# Altium PCB PCB_Air_Quality.pcbdoc
Units mil, origin at the board's own origin, x right, y up, seen from the top; angles counter-clockwise.
Board outline 4625 x 4090 mil, 2 copper layers (Top Layer, Bottom Layer); 49 components, 34 nets, 123 pads, 36 vias.
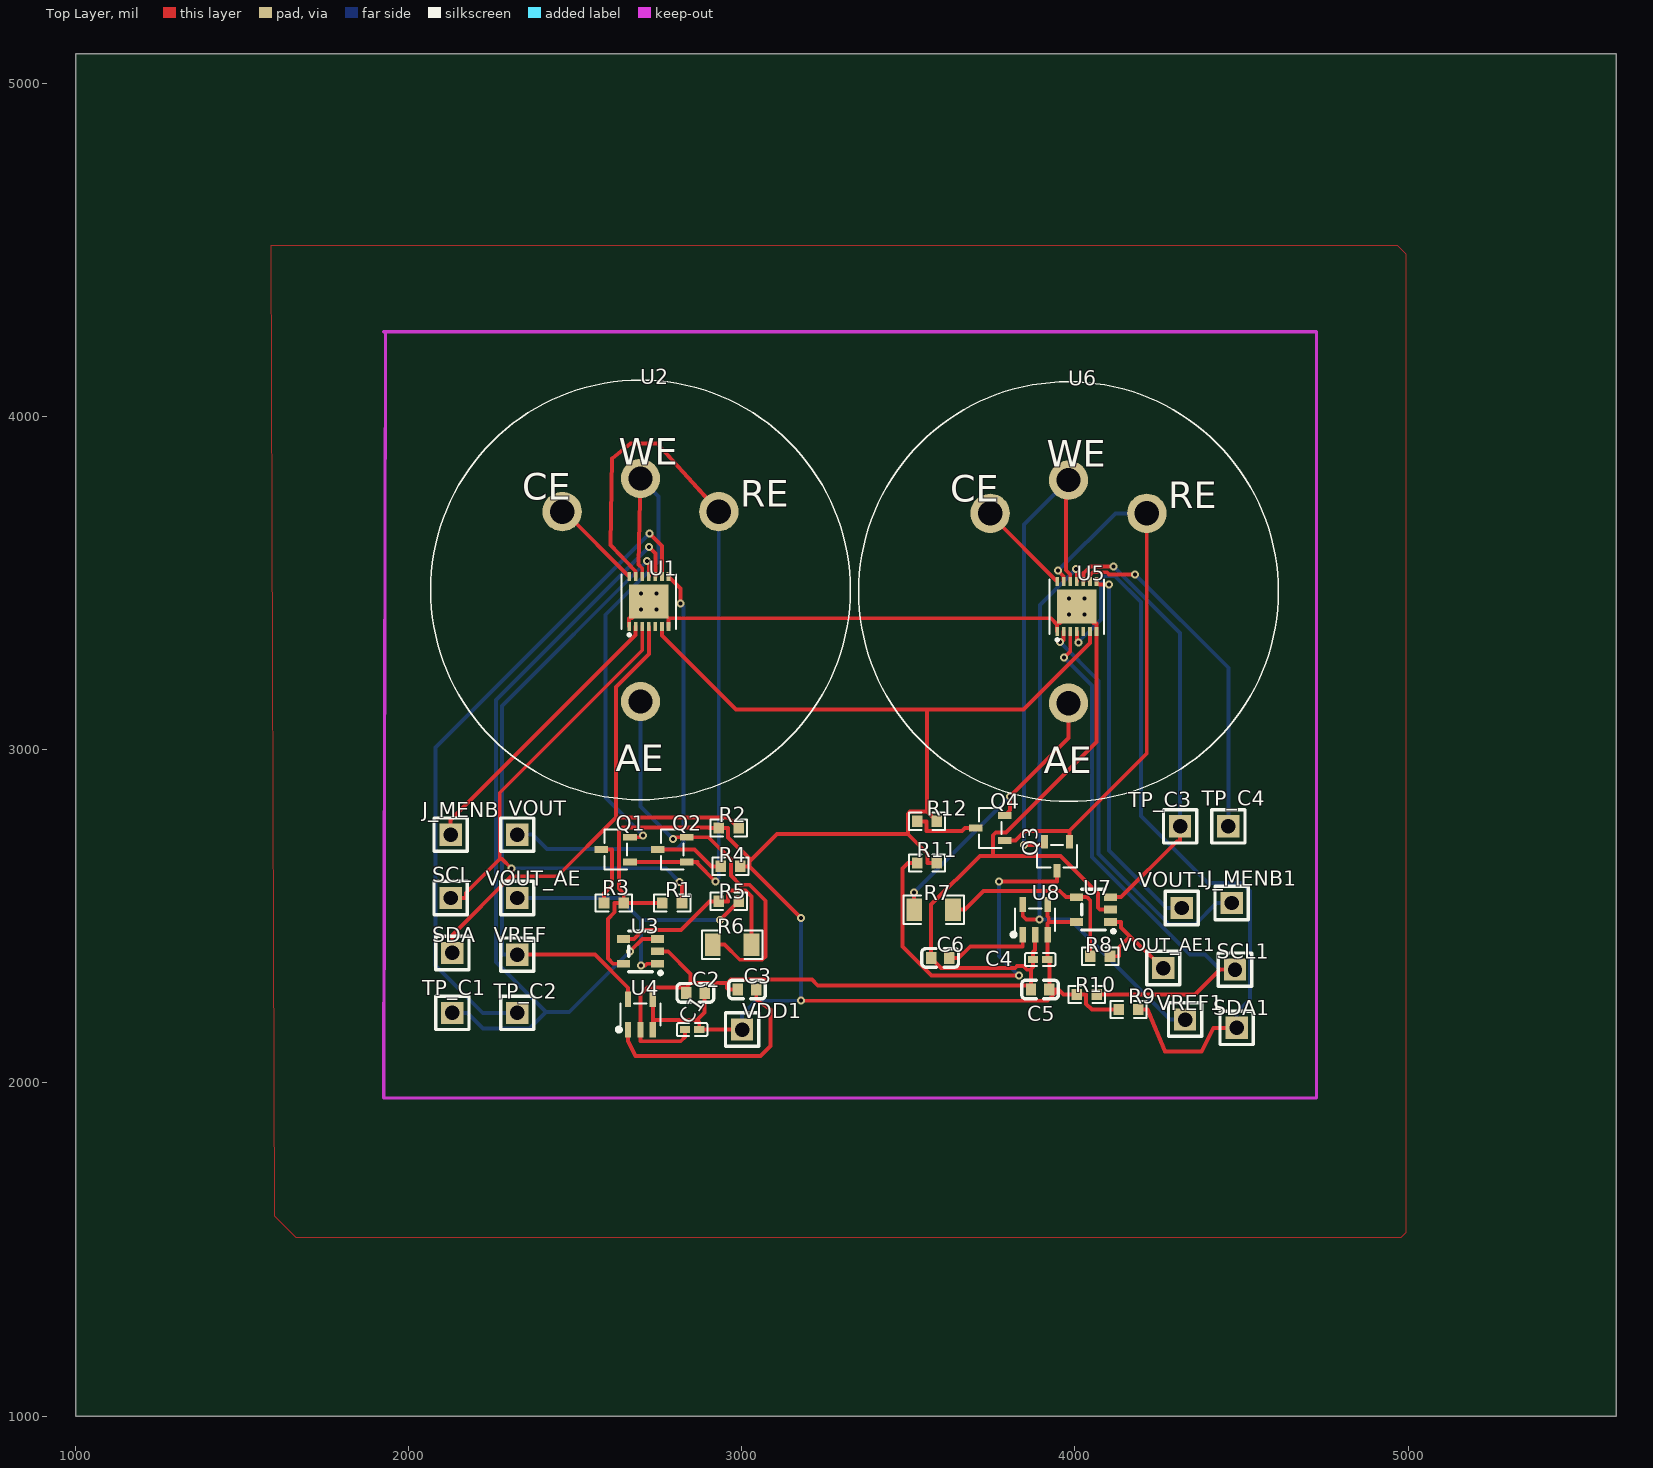
[diagram p0: Top Layer view]
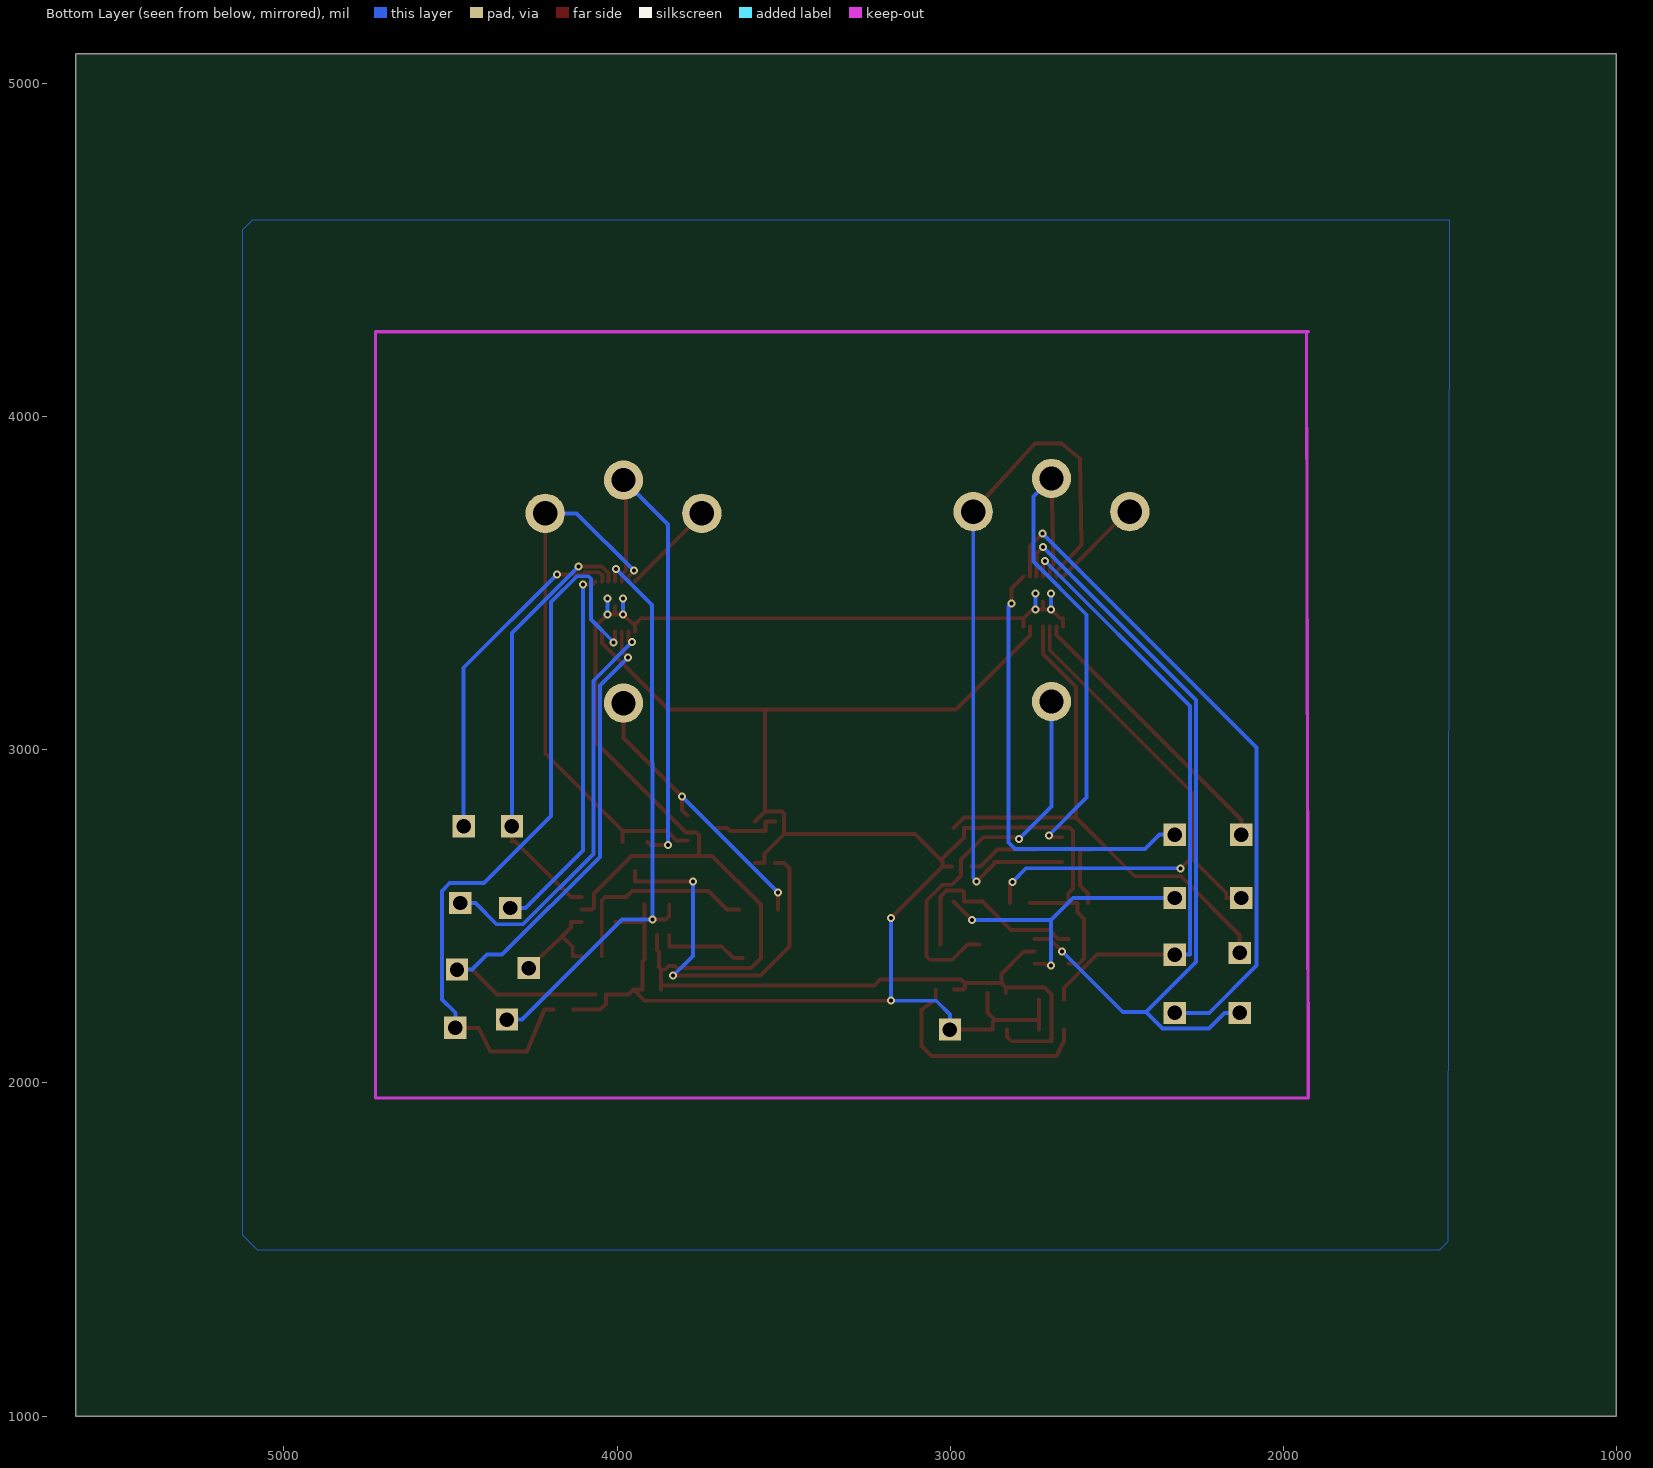
[diagram p1: Bottom Layer view, seen from below]

## Layer stack, top to bottom
Top Solder: solder mask 0.4, Solder Resist, Dk 3.5
Top Layer: signal copper 1.4
Dielectric1: dielectric 12.6, FR-4, Dk 4.8
Bottom Layer: signal copper 1.4
Bottom Solder: solder mask 0.4, Solder Resist, Dk 3.5

## Board outline
5625,1000 1000,1000 1000,5090 5625,5090

## Design rules (kind name [scope] priority, off if disabled: settings)
Clearance [All] p1: gap=10 ignorepadtopadclearanceinfootprint=FALSE except(0: Arc-Hole Track-Hole SMDPad-Hole THPad-Hole Via-Hole Fill-Hole Poly-Hole Region-Hole Text-Hole)
PolygonConnect [All] p1: connectstyle=Relief reliefconductorwidth=10 reliefentries=4 polygonreliefangle="90 Angle" airgapwidth=10
RoutingVias [All] p1: holewidth=28 width=50 viastyle="Through Hole" minholewidth=28 minwidth=50 maxholewidth=28 maxwidth=50
SolderMaskExpansion [All] p1: expansion=4 istentingtop=FALSE
Width [All] p1: maxlimit=10 minlimit=10 preferedwidth=10
30 further rules are at their usual default settings.

## Components (designator, comment, footprint, x,y, rotation, side; value= is the part's Value field where it differs from the comment)
C1 "100nF" C0402 2850.5,2160.35 r0 top
C2 "100nF" C0603 2860.5,2270.35 r0 top
C3 "56pF" C0603 3015.5,2280.35 r0 top
C4 "100nF" C0402 3895.5,2370.35 r0 top
C5 "100nF" C0603 3895.5,2280.35 r0 top
C6 "56pF" C0603 3595.5,2375.35 r0 top
J_MENB "Header-Male-2.54_1x1" HDR-TH_1P-P2.54-V-M 2125.5,2745.35 r0 top
J_MENB1 "Header-Male-2.54_1x1" HDR-TH_1P-P2.54-V-M 4470.5,2540.35 r0 top
Q1 "MMBFJ177LT1G_C106763" SOT-23-3_L3.0-W1.7-P0.95-LS2.9-BR 2620.5,2700.35 r0 top
Q2 "MMBFJ177LT1G_C106763" SOT-23-3_L3.0-W1.7-P0.95-LS2.9-BR 2790.5,2700.35 r0 top
Q3 "MMBFJ177LT1G_C106763" SOT-23-3_L3.0-W1.7-P0.95-LS2.9-BR 3945.5,2680.35 r90 top
Q4 "MMBFJ177LT1G_C106763" SOT-23-3_L3.0-W1.7-P0.95-LS2.9-BR 3745.5,2765.35 r0 top
R1 "10K" R0603 2790.5,2540.35 r0 top
R2 "10K" R0603 2960.5,2765.35 r0 top
R3 "1K" R0603 2615.5,2540.35 r0 top
R4 "1K" R0603 2965.5,2650.35 r0 top
R5 "14K" R0603 2960.5,2545.35 r0 top
R6 "10" R1206 2970.5,2415.35 r0 top
R7 "10" R1206 3575.5,2520.35 r0 top
R8 "14K" R0603 4075.5,2380.35 r0 top
R9 "10K" R0603 4160.5,2220.35 r0 top
R10 "10K" R0603 4035.5,2265.35 r0 top
R11 "1K" R0603 3555.5,2660.35 r0 top
R12 "1K" R0603 3555.5,2785.35 r0 top
SCL "Header-Male-2.54_1x1" HDR-TH_1P-P2.54-V-M 2125.5,2555.35 r0 top
SCL1 "Header-Male-2.54_1x1" HDR-TH_1P-P2.54-V-M 4480.5,2340.35 r0 top
SDA "Header-Male-2.54_1x1" HDR-TH_1P-P2.54-V-M 2130.5,2390.35 r0 top
SDA1 "Header-Male-2.54_1x1" HDR-TH_1P-P2.54-V-M 4485.5,2165.35 r0 top
TP_C1 "Header-Male-2.54_1x1" HDR-TH_1P-P2.54-V-M 2130.5,2210.35 r0 top
TP_C2 "Header-Male-2.54_1x1" HDR-TH_1P-P2.54-V-M 2325.5,2210.35 r0 top
TP_C3 "Header-Male-2.54_1x1" HDR-TH_1P-P2.54-V-M 4315.5,2770.35 r0 top
TP_C4 "Header-Male-2.54_1x1" HDR-TH_1P-P2.54-V-M 4460.5,2770.35 r0 top
U1 "LMP91000SDE/NOPB" WSON-14_L4.0-W4.0-P0.50-BL-EP 2720.5,3445.35 r0 top
U2 "NO-B4" "ALPHASENSE B1" 2695.5,3480.35 r0 top
U3 "LMP2231AMFE/NOPB" SOT-23-5_L3.0-W1.7-P0.95-LS2.8-BR 2695.5,2395.35 r0 top
U4 "LM4120AIM5X-2.5/NOPB" SOT-23-5_L3.0-W1.7-P0.95-LS2.8-BL 2695.5,2205.35 r0 top
U5 "LMP91000SDE/NOPB" WSON-14_L4.0-W4.0-P0.50-BL-EP 4005.5,3430.35 r0 top
U6 "NO-B4" "ALPHASENSE B1" 3980.5,3475.35 r0 top
U7 "LMP2231AMFE/NOPB" SOT-23-5_L3.0-W1.7-P0.95-LS2.8-BR 4055.5,2520.35 r0 top
U8 "LM4120AIM5X-2.5/NOPB" SOT-23-5_L3.0-W1.7-P0.95-LS2.8-BL 3880.5,2490.35 r0 top
VDD1 "Header-Male-2.54_1x1" HDR-TH_1P-P2.54-V-M 3000.5,2160.35 r0 top
VOUT "Header-Male-2.54_1x1" HDR-TH_1P-P2.54-V-M 2325.5,2745.35 r0 top
VOUT1 "Header-Male-2.54_1x1" HDR-TH_1P-P2.54-V-M 4320.5,2525.35 r0 top
VOUT_AE "Header-Male-2.54_1x1" HDR-TH_1P-P2.54-V-M 2325.5,2555.35 r0 top
VOUT_AE1 "Header-Male-2.54_1x1" HDR-TH_1P-P2.54-V-M 4265,2345 r0 top
VREF "Header-Male-2.54_1x1" HDR-TH_1P-P2.54-V-M 2325.5,2385.35 r0 top
VREF1 "Header-Male-2.54_1x1" HDR-TH_1P-P2.54-V-M 4330.5,2190.35 r0 top
? "" ? 2545.5,3730.35 r0 top
? "" ? 3830.5,3725.35 r0 top

## Footprints (in the part's own frame and the unit in brackets; to place one, negate y for a bottom-side part, rotate by r counter-clockwise, add the part's x,y. Pads: shape width x height; smd on the part's side, far side on the other; paste and mask are expansions set on the pad)
"ALPHASENSE B1" [mil]
  silkscreen extent -630,-630 630,630
C0402 [mm]
  rect 0.79x0.54 smd paste-100 mask+0.051: 1(-0.545,0) 2(0.545,0)
  silkscreen extent -1.17,-0.5 1.17,0.5
C0603 [mm]
  rect 0.8x0.9 smd paste+0 mask+0.051: 1(-0.7,0) 2(0.7,0)
  silkscreen extent -1.41,-0.71 1.39,0.72
HDR-TH_1P-P2.54-V-M [mm]
  rect 1.7x1.7 hole 1.1 paste+0 mask+0.051: 1(0,0)
  silkscreen extent -1.27,-1.27 1.27,1.27
R0603 [mil]
  rect 31.75x34.02 smd paste-3937.01 mask+2: 1(-29.65,0) 2(29.66,0)
  silkscreen extent -55,-26 55,26
R1206 [mil]
  rect 47.54x66.97 smd paste-3937.01 mask+2: 1(-58.22,0) 2(58.22,0)
  silkscreen extent -91,-42 91,42
SOT-23-3_L3.0-W1.7-P0.95-LS2.9-BR [mm]
  rect 1.037x0.532 smd paste+0 mask+0.051: 1(1.101,-0.95) 2(1.101,0.95) 3(-1.101,0)
  silkscreen extent -0.86,-1.53 0.86,1.53
SOT-23-5_L3.0-W1.7-P0.95-LS2.8-BL [mm]
  rect 0.49x1.157 smd paste+0 mask+0.051: 1(-0.95,-1.154) 2(0,-1.154) 3(0.95,-1.154)
  rect 0.49x1.175 smd paste+0 mask+0.051: 4(0.95,1.154) 5(-0.95,1.154)
  silkscreen extent -1.8,-1.29 1.53,0.85
SOT-23-5_L3.0-W1.7-P0.95-LS2.8-BR [mm]
  rect 1x0.6 smd paste+0 mask+0.051: 1(1.3,-0.95) 2(1.3,0) 3(1.3,0.95) 4(-1.3,0.95) 5(-1.3,-0.95)
  silkscreen extent -0.9,-1.78 1.65,1.55
WSON-14_L4.0-W4.0-P0.50-BL-EP [mm]
  rect 0.28x0.665 smd paste+0 mask+0.051: 1(-1.5,-1.907) 2(-1,-1.907) 3(-0.5,-1.907) 4(0,-1.907) 5(0.5,-1.907) 6(1,-1.907) 7(1.5,-1.907) 8(1.5,1.907) 9(1,1.907) 10(0.5,1.907) 11(0,1.907) 12(-0.5,1.907) 13(-1,1.907) 14(-1.5,1.907)
  rect 3x2.6 smd paste+0 mask+0.051: 15(0,0)
  silkscreen extent -2.08,-2.64 2.08,2.08
? [mil]

## Free pads (board coordinates)
  round 118.11 hole 72.83 paste+0 mask+4: 1(2695.5,3814.99) 1(3980.5,3809.99) 2(2460.5,3715.35) 2(3745.5,3710.35) 3(2930.5,3715.35) 3(4215.5,3710.35) 4(2695.5,3145.35) 4(3980.5,3140.35)

## Via types
v1: diameter 24.02, hole 12.01, Top Layer to Bottom Layer, 28 vias
v2: diameter 24, hole 12, Top Layer to Bottom Layer, 8 vias

## Nets (pads, with @x,y where several pads share a name; then routed paths per layer and width w, separated by ;. In a path a pad name is that pad's centre, name@x,y a point inside that pad or via, vN(x,y) a via of type N, cw(c..) or ccw(c..) an arc to the next point about the centre after c; other vN are vias at no path point)
C3_2: C3.2 U4.1 | length 694.1
  Top Layer w11.81: U4.1 2658.1,2125.25 2680.5,2080.35 3055.5,2080.35 3085.5,2110.35 3085.5,2220.35 3043.06,2250.73 C3.2
GND: C1.1 C2.1 C3.1 C4.1 C5.1 C6.1 U1.1 U1.7 U1.15 U3.2 U4.2 U5.1 U5.7 U5.15 U7.2 U8.2 | length 5671.1
  Top Layer w11.81: U1.1@2661.45,3370.25 2661.45,3395.24 2670.38,3395.24 v2(2696.87,3421.73) U1.15@2720.5,3421.73 ; U1.15 U1.15@2720.5,3421.73 ; v2(2744.12,3421.72) 2753.08,3421.72 2779.56,3395.24 ; v2(2744.12,3421.72) U1.15@2720.5,3421.73 ; U3.2 2778.28,2395.35 2845.93,2327.7 2845.93,2300.04 ; U1.7@2779.56,3370.25 2779.56,3395.24 ; C1.1 2829.04,2137.82 2816.4,2125.18 2695.57,2125.18 2695.5,2125.25 2695.5,2142.59 U4.2 2695.5,2265.43 2717.12,2287.05 C2.1@2832.94,2287.05 ; C2.1 C2.1@2832.94,2287.05 ; C3.1 2960.29,2280.35 2954.91,2285.73 2954.91,2297.88 ; C5.1 C5.1@3867.94,2292.95 ; U8.2 3880.5,2399.34 3874.04,2392.88 C4.1 3874.04,2347.82 3866.16,2339.94 ; U5.1@3946.45,3355.25 3946.45,3376.44 ; U5.15 U5.15@4005.5,3406.73 ; v2(4029.12,3406.72) 4055.6,3380.24 4064.56,3380.24 4064.56,3367.75 4064.56,3355.25 4064.56,3023.32 3793.07,2751.83 3762.04,2751.83 3754,2743.79 3754,2681.64 ; v2(4029.12,3406.72) U5.15@4005.5,3406.73 ; U7.2 4075.11,2520.35 4069.42,2526.04 4069.42,2568.31 3956.9,2680.83 3754.81,2680.83 3754,2681.64 ; 2779.56,3395.24 3927.65,3395.24 3946.45,3376.44 ; C2.1@2832.94,2287.05 2845.93,2300.04 ; 2845.93,2300.04 2952.75,2300.04 2954.91,2297.88 ; 2954.91,2297.88 2967.07,2310.04 3210.68,2310.04 3227.77,2292.95 C5.1@3867.94,2292.95 ; 3754,2681.64 3714.32,2681.64 3567.94,2535.26 C6.1 3598.04,2345.25 3820.54,2345.25 3825.85,2350.56 3845.72,2350.56 3856.34,2339.94 3866.16,2339.94 ; 3866.16,2339.94 3867.94,2338.16 3867.94,2305.55 C5.1@3867.94,2292.95 ; 3946.45,3376.44 3946.45,3380.24 3955.38,3380.24 v2(3981.87,3406.73) U5.15@4005.5,3406.73
  Bottom Layer w11.81: v2(2696.87,3421.73) v2(2696.88,3468.98) ; v2(2744.12,3421.72) v2(2744.13,3468.97) ; v2(3981.87,3406.73) v2(3981.88,3453.98) ; v2(4029.12,3406.72) v2(4029.13,3453.97)
J_MENB1_1: J_MENB1.1 U5.2 | length 1237.1
  Top Layer w11.81: v1(3954.78,3323.99) 3961.05,3330.26 3966.13,3330.26 U5.2@3966.13,3355.25
  Bottom Layer w11.81: v1(3954.78,3323.99) 4071.23,3207.54 4071.23,2687 4281.79,2476.44 4361.23,2476.44 4425.14,2540.35 J_MENB1.1
R3_1: Q1.3 R3.1 | length 202.1
  Top Layer w11.81: Q1.3 2609.47,2700.35 2609.47,2592.89 2585.84,2569.26 R3.1
R4_1: Q2.3 R4.1 | length 209.4
  Top Layer w11.81: Q2.3 2858.07,2700.35 2908.07,2650.35 R4.1
R7_1: pad.4@3980.5,3140.35 Q4.2 R7.1 | length 875.8
  Top Layer w11.81: R7.1 v1(3517.28,2572.28) ; Q4.2@3788.86,2802.75 3805,2818.89 v1(3805,2860) 3980.5,3035.5 pad.4@3980.5,3140.35
  Bottom Layer w11.81: v1(3517.28,2572.28) v1(3805,2860)
R7_2: R7.2 R8.1 U7.4 | length 614.5
  Top Layer w11.81: R7.2 3669.39,2520.35 3725.31,2576.27 3954.22,2576.27 3972.74,2557.75 4004.32,2557.75 4020.12,2557.75 4035.91,2557.75 4045.84,2547.82 R8.1
R8_2: R8.2 U7.1 VOUT_AE1.1 | length 336.3
  Top Layer w11.81: R8.2 4132.93,2380.35 4132.93,2408.12 4165.15,2440.34 ; U7.1 4138.28,2482.95 4138.28,2467.21 4165.15,2440.34 ; VOUT_AE1.1@4270.14,2335.35 4265,2340.49 VOUT_AE1.1 4165.15,2440.34
R11_1: Q3.3 R11.1 | length 1184.3
  Top Layer w11.81: R11.1 3498.07,2660.35 3481.52,2643.8 3481.52,2409.39 3568.85,2322.06 v1@3831.25,2322.06 ; v1(3772.09,2604.67) 3945.5,2604.67 Q3.3
  Bottom Layer w11.81: v1(3772.09,2604.67) 3772.09,2381.22 v1@3831.25,2322.06
  other v1: 3831.25,2322.06
R12_1: Q4.3 R12.1 | length 208.3
  Top Layer w11.81: R12.1 3553.62,2785.35 3553.62,2757.57 3554.82,2756.37 3660.84,2756.37 3669.82,2765.35 Q4.3
SCL1_1: R10.2 SCL1.1 U5.3 | length 1734.3
  Top Layer w11.81: v1(3967.58,3277.28) 3985.82,3295.52 U5.3@3985.82,3355.25 ; R10.2 4360.14,2265.35 4435.14,2340.35 SCL1.1
  Bottom Layer w11.81: v1(3967.58,3277.28) 4051.52,3193.34 4051.52,2678.88 4344.69,2385.71 4389.78,2385.71 4435.14,2340.35 SCL1.1
SDA1_1: R9.2 SDA1.1 U5.4 | length 2321.2
  Top Layer w11.81: U5.4@4005.5,3355.25 4005.5,3327.41 v1(4009.8,3323.11) ; R9.2 4217.93,2220.35 ; 4217.9,2220.3 4270,2095 4380,2095 4415.4,2165.3 SDA1.1
  Bottom Layer w11.81: v1(4009.8,3323.11) 4078.29,3391.6 4078.29,3513.91 4085.65,3521.27 4120.36,3521.27 4198.16,3443.47 4198.16,2801.84 4399.76,2600.24 4502.28,2600.24 4525.94,2576.58 4525.94,2251.16 4485.5,2210.72 SDA1.1
TP_C3_1: TP_C3.1 U5.10 U7.3 | length 1311.1
  Top Layer w11.81: U5.10 4025.19,3530.44 4045.89,3551.14 v1(4115.77,3551.14) ; U7.3 4138.28,2557.75 4305.52,2724.99 4315.5,2724.99 TP_C3.1
  Bottom Layer w11.81: v1(4115.77,3551.14) 4315.5,3351.41 TP_C3.1
TP_C4_1: TP_C4.1 U5.9 | length 1035
  Top Layer w11.81: U5.9 4043.07,3507.25 4043.07,3509.22 4043.07,3523.04 4053.29,3533.26 4095.99,3533.26 4102.09,3527.16 v1(4180.03,3527.16)
  Bottom Layer w11.81: v1(4180.03,3527.16) 4460.5,3246.69 TP_C4.1
U1_2: J_MENB.1 U1.2 | length 855.7
  Top Layer w11.81: J_MENB.1 2125.5,2790.72 2126.59,2790.72 2681.13,3345.26 U1.2@2681.13,3370.25
U1_3: R1.2 SCL.1 U1.3 | length 1714.2
  Top Layer w11.81: SCL.1 2170.87,2555.35 2170.87,2569.9 2272.95,2671.98 ; v1(2307.54,2644.6) 2280.16,2671.98 2272.95,2671.98 ; U1.3@2700.82,3370.25 2700.82,3299.12 2272.95,2871.25 2272.95,2671.98 ; v1(2812.41,2603.93) 2820.16,2596.18 R1.2
  Bottom Layer w11.81: v1(2307.54,2644.6) 2771.74,2644.6 v1(2812.41,2603.93)
U1_4: R2.2 SDA.1 U1.4 | length 1687
  Top Layer w11.81: SDA.1 2130.5,2444.83 2306.3,2620.63 2445.51,2620.63 2622.33,2797.45 ; U1.4@2720.5,3370.25 2720.5,3287.47 2622.33,3189.3 2622.33,2797.45 ; R2.2 2958.06,2797.45 2622.33,2797.45
U1_8: U1.8 VOUT.1 | length 1342.6
  Top Layer w11.81: U1.8 2815.9,3484.11 v1(2815.9,3439.48)
  Bottom Layer w11.81: VOUT.1 2370.87,2745.35 2414.29,2701.93 2804.62,2701.93 2824.61,2721.92 2824.61,3430.77 v1(2815.9,3439.48)
U1_9: TP_C2.1 U1.9 | length 2011.8
  Top Layer w11.81: v1@2722.71,3649.35 2759.87,3612.19 U1.9
  Bottom Layer w11.81: TP_C2.1 2221.96,2210.35 2080.07,2352.24 2080.07,3006.71 v1@2722.71,3649.35
  other v1: 2722.71,3649.35
U2_1: pad.1@2695.5,3814.99 Q1.2 U1.12 | length 1548.9
  Top Layer w11.81: Q1.2@2663.86,2737.75 2696.18,2737.75 2701.79,2743.36 v1@2703.65,2743.36 ; pad.1@2695.5,3815 2689.37,3556.89 2700.82,3545.44 U1.12
  Bottom Layer w11.81: pad.1@2695.5,3815 2749.9,3760.6 2749.9,3565.7 2590,3405.8 2590,2857.1 v1@2703.7,2743.4
  other v1: 2703.65,2743.36
U2_2: pad.2@2460.5,3715.35 U1.14 | length 281.7
  Top Layer w11.81: pad.2@2460.5,3715.35 2466.55,3715.35 U1.14@2661.45,3520.45
U2_3: pad.3@2930.5,3715.35 Q1.1 Q2.1 U1.13 | length 2209.8
  Top Layer w11.81: Q1.1 Q2.1 2866.18,2662.95 2866.18,2658.81 v1(2920.01,2604.98) ; U1.13 2681.13,3536.28 2605.5,3615.35 2610.5,3875.35 2665.5,3920.35 2745.5,3920.35 pad.3@2930.5,3715.35
  Bottom Layer w11.81: v1(2920.01,2604.98) 2930.5,2615.47 pad.3@2930.5,3715.35
U2_4: pad.4@2695.5,3145.35 Q2.2 R6.1 | length 1188.4
  Top Layer w11.81: v1(2792.6,2732.85) 2796.63,2732.85 2801.53,2737.75 2833.86,2737.75 2900.07,2737.75 2967.31,2670.51 2967.31,2622.75 2994.86,2595.2 3022.42,2595.2 3070.6,2547.02 3070.6,2379.49 3061.01,2369.9 2993.4,2369.9 2947.95,2415.35 R6.1
  Bottom Layer w11.81: pad.4@2695.5,3145.35 2695.5,2829.95 v1(2792.6,2732.85)
U3_1: R5.2 U3.1 VOUT_AE.1 | length 903.6
  Top Layer w11.81: v1@2697.25,2352.55 2709.71,2352.55 2715.11,2357.95 U3.1 ; v1(2933.59,2488.78) R5.2
  Bottom Layer w11.81: VOUT_AE.1 2630.68,2555.35 2697.25,2488.78 ; v1@2697.25,2352.55 2697.25,2488.78 ; v1(2933.59,2488.78) 2697.25,2488.78
  other v1: 2697.25,2352.55
U3_3: TP_C1.1 U1.10 U3.3 | length 2493.4
  Top Layer w11.81: v1@2664.32,2395.35 2701.72,2432.75 U3.3 ; v1(2720.41,3609.25) 2740.19,3589.47 U1.10
  Bottom Layer w11.81: TP_C1.1 2175.87,2210.35 2222.94,2163.28 2362.89,2163.28 2412.16,2212.55 ; v1@2664.32,2395.35 2481.51,2212.54 2412.16,2212.54 ; v1(2720.41,3609.25) 2261.57,3150.41 2261.57,2363.13 2412.16,2212.55
  other v1: 2664.32,2395.35
U3_4: R5.1 R6.2 U3.4 | length 612.2
  Top Layer w11.81: U3.4@2644.32,2432.75 2675.91,2432.75 2702.14,2458.98 2816.7,2458.98 2903.07,2545.35 R5.1 2958.62,2545.35 2958.62,2573.13 2962.81,2577.32 3011.05,2577.32 3028.72,2559.65 R6.2
U4_5: U1.11 U4.5 VREF.1 | length 1866.6
  Top Layer w11.81: VREF.1 2366.45,2385.35 2558.55,2385.35 2658.1,2285.8 U4.5 ; v1(2715.76,3567.85) 2720.5,3563.11 U1.11
  Bottom Layer w11.81: VREF.1 2280.14,2385.35 2280.07,2385.42 2280.07,3132.16 v1(2715.76,3567.85)
U5_12: pad.1@3980.5,3809.99 Q3.2 U5.12 | length 1528
  Top Layer w11.81: v1@3846.86,2714.95 3899.34,2714.95 Q3.2 ; pad.1@3980.5,3810 3973.26,3802.76 3973.26,3539.43 3985.82,3526.87 U5.12
  Bottom Layer w11.81: v1@3846.86,2714.95 3846.86,3676.36 pad.1@3980.5,3810
  other v1: 3846.86,2714.95
U5_13: pad.3@4215.5,3710.35 Q3.1 Q4.1 U5.13 | length 1665.9
  Top Layer w11.81: Q4.1 3821.18,2727.95 3849.33,2756.1 3982.83,2756.1 ; v1(3949.29,3538.12) 3966.13,3521.28 U5.13 ; Q3.1 3982.9,2756.03 3982.83,2756.1 ; pad.3@4215.5,3710.35 4215.5,2988.77 3982.83,2756.1
  Bottom Layer w11.81: v1(3949.29,3538.12) 4121.52,3710.35 pad.3@4215.5,3710.35
U5_14: pad.2@3745.5,3710.35 U5.14 | length 288.1
  Top Layer w11.81: pad.2@3745.5,3710.35 3745.5,3706.4 U5.14@3946.45,3505.45
U8_1: C6.2 U8.1 | length 269.2
  Top Layer w11.81: C6.2 3650.71,2375.35 3685.61,2410.25 3843.1,2410.25 U8.1
VDD: C1.2 C2.2 C4.2 C5.2 R1.1 R2.1 R3.2 R4.2 R9.1 R10.1 R11.2 R12.2 U1.6 U3.5 U4.3 U4.4 U5.6 U7.5 U8.3 U8.4 VDD1.1 | length 6294.9
  Top Layer w11.81: U3.5@2644.32,2357.95 2612.74,2357.95 2597.57,2373.12 2597.57,2492.76 2617.38,2512.57 2617.38,2540.35 R3.2 ; U4.3 2732.9,2189.12 ; U4.4 2732.9,2189.12 ; U1.6@2759.87,3370.25 2759.87,3343.72 2982.51,3121.08 3555.92,3121.08 ; R1.1 R3.2 ; C2.2 2888.06,2211.46 2865.72,2189.12 ; R4.2 3022.93,2650.35 ; VDD1.1 C1.2 2871.96,2182.88 2865.72,2189.12 ; v1(3177.44,2246.86) 3917.22,2246.86 3950.71,2280.35 ; v1(3177.44,2495.84) 3022.93,2650.35 ; R11.2 3557.38,2660.35 3557.38,2688.13 3498,2747.51 ; R12.2 3555.92,2814.59 ; C4.2 C4.2@3916.96,2371.59 ; U8.4 3917.9,2500.74 3921.24,2497.4 3921.24,2482.95 ; U7.5@4004.32,2482.95 3988.53,2482.95 3921.24,2482.95 ; U5.6@4044.87,3355.25 4044.87,3320.66 3845.29,3121.08 3555.92,3121.08 ; R9.1 4050.84,2220.35 4033.62,2237.57 4033.62,2265.35 R10.1 3965.71,2265.35 3950.71,2280.35 ; R3.2 2645.16,2569.26 2630.72,2583.7 2630.72,2756.42 2641.63,2767.33 2901.09,2767.33 2903.07,2765.35 R2.1 2944.73,2765.35 2958.62,2765.35 2958.62,2737.57 3026.98,2669.21 ; 2732.9,2189.12 2865.72,2189.12 ; 3022.93,2650.35 3022.93,2665.16 3026.98,2669.21 ; 3026.98,2669.21 3105.28,2747.51 3498,2747.51 ; 3498,2747.51 3498,2807.35 3505.24,2814.59 3555.92,2814.59 ; 3555.92,2814.59 3555.92,3121.08 ; C4.2@3916.96,2371.59 3916.96,2392.88 3917.9,2393.82 U8.3 3917.9,2479.61 3921.24,2482.95 ; C4.2@3916.96,2371.59 3923.06,2365.49 C5.2 3950.71,2280.35
  Bottom Layer w11.81: VDD1.1 3000.5,2205.72 3041.64,2246.86 v1(3177.44,2246.86) v1(3177.44,2495.84)
VOUT1_1: U5.8 VOUT1.1 | length 1129.9
  Top Layer w11.81: U5.8 4072.89,3497.12 v1(4102.27,3497.12)
  Bottom Layer w11.81: v1(4102.27,3497.12) 4102.27,2698.22 4275.14,2525.35 VOUT1.1
VREF1_1: U5.11 U8.5 VREF1.1 | length 1800.5
  Top Layer w11.81: U8.5 3843.1,2500.74 3853.66,2490.18 v1(3894.14,2490.18) ; v1(4003.13,3543.47) 4005.5,3541.1 4005.5,3530.44 U5.11
  Bottom Layer w11.81: v1(3894.14,2490.18) 3895,3435.3 v1(4003.13,3543.47) ; v1(3894.14,2490.18) 3907.47,2490.18 3985.31,2490.18 4285.14,2190.35 VREF1.1 ; v1@3895,2490.2 3907.5,2490.2
pads on no net: U1.5 U5.5

## Polygon pours and split planes (outlines as drawn)
GND on Bottom Layer "Bottom Layer-GND" (solid, pour order 0): 1500,4590 5095,4590 5125,4560 5125,1545 5080,1500 1530,1500 1505,1525
GND on Top Layer "Top Layer-GND" (solid, pour order 1): 1587.5,4515 4967.5,4515 4992.5,4490 4992.5,1550 4977.5,1535 1662.5,1535 1597.5,1600

## Silkscreen, mask and mechanical layers (free items; w line width, h text height)
Top Overlay:
  text "WE" at 2630.5,3855.35 h80
  text "WE" at 3915.5,3850.35 h80
  text "CE" at 2340.5,3750.35 h80
  text "CE" at 3625.5,3745.35 h80
  text "RE" at 2995.5,3730.35 h80
  text "RE" at 4280.5,3725.35 h80
  text "AE" at 2620.5,2935.35 h80
  text "AE" at 3905.5,2930.35 h80